# Altium PCB Smart Bottle.PcbDoc
Units mm, origin at the board's own origin, x right, y up, seen from the top; angles counter-clockwise.
Board outline 56.39 x 47.12 mm, 2 copper layers (Top Layer, Bottom Layer), stack 1 mm thick; 12 components, 14 nets, 71 pads, 1 vias.
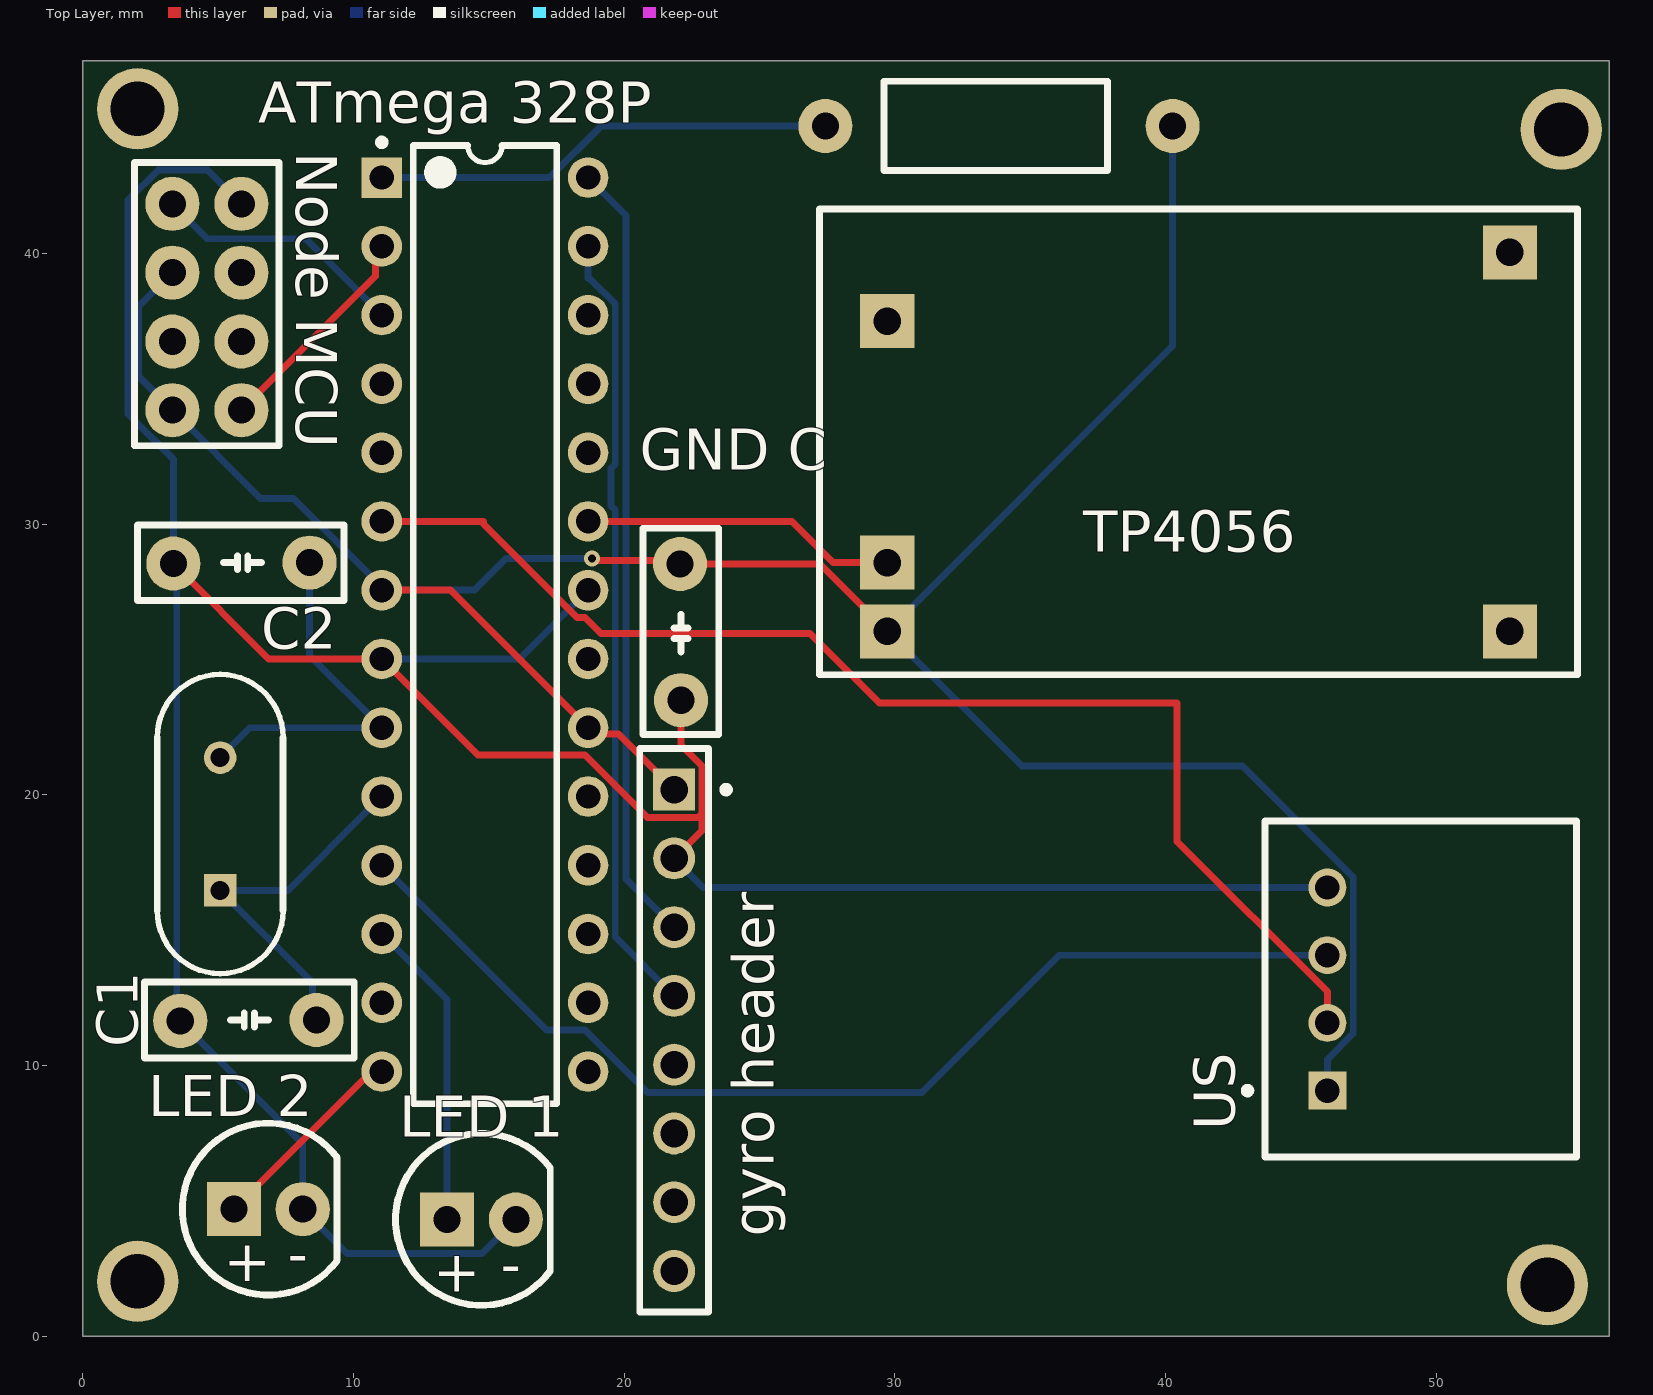
[diagram p0: Top Layer view]
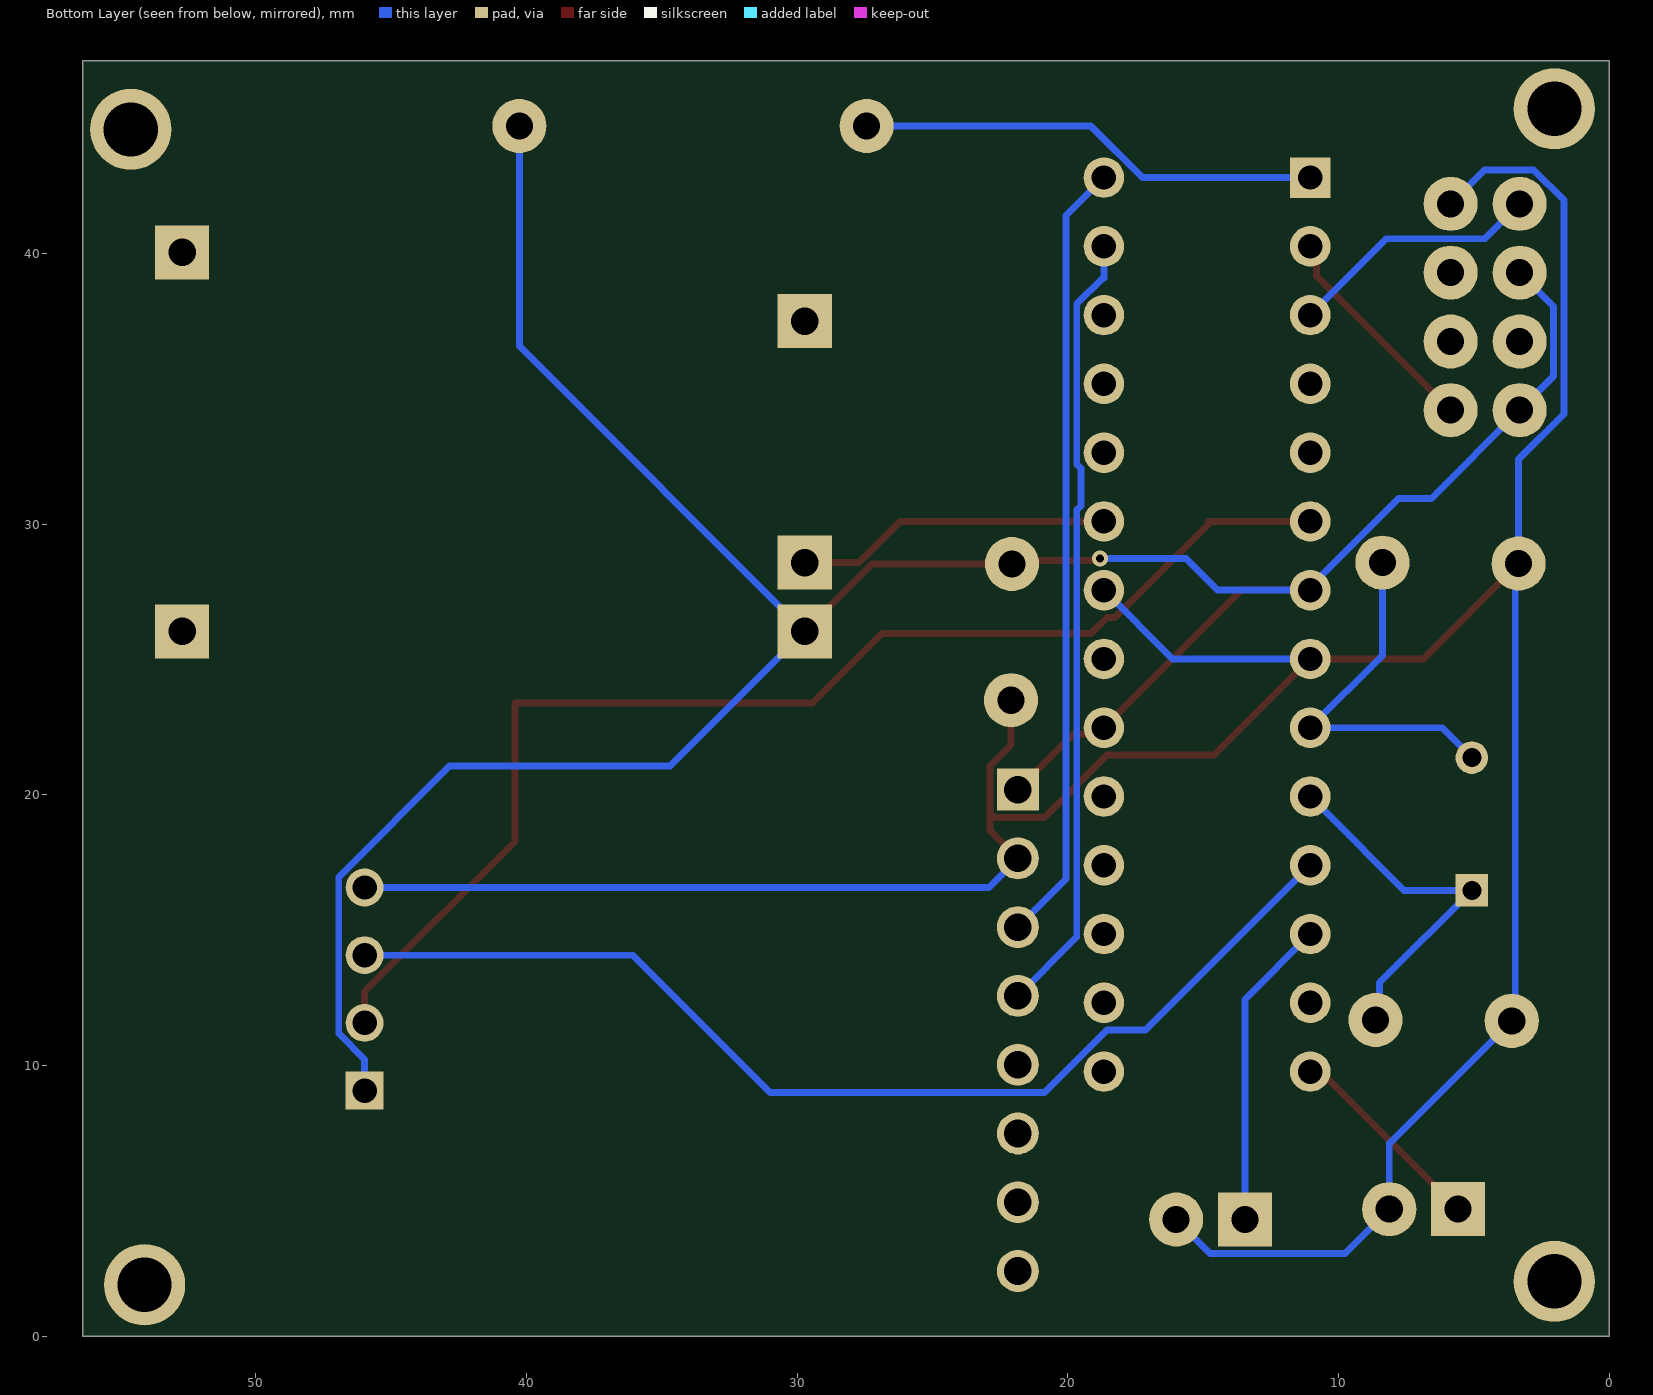
[diagram p1: Bottom Layer view, seen from below]
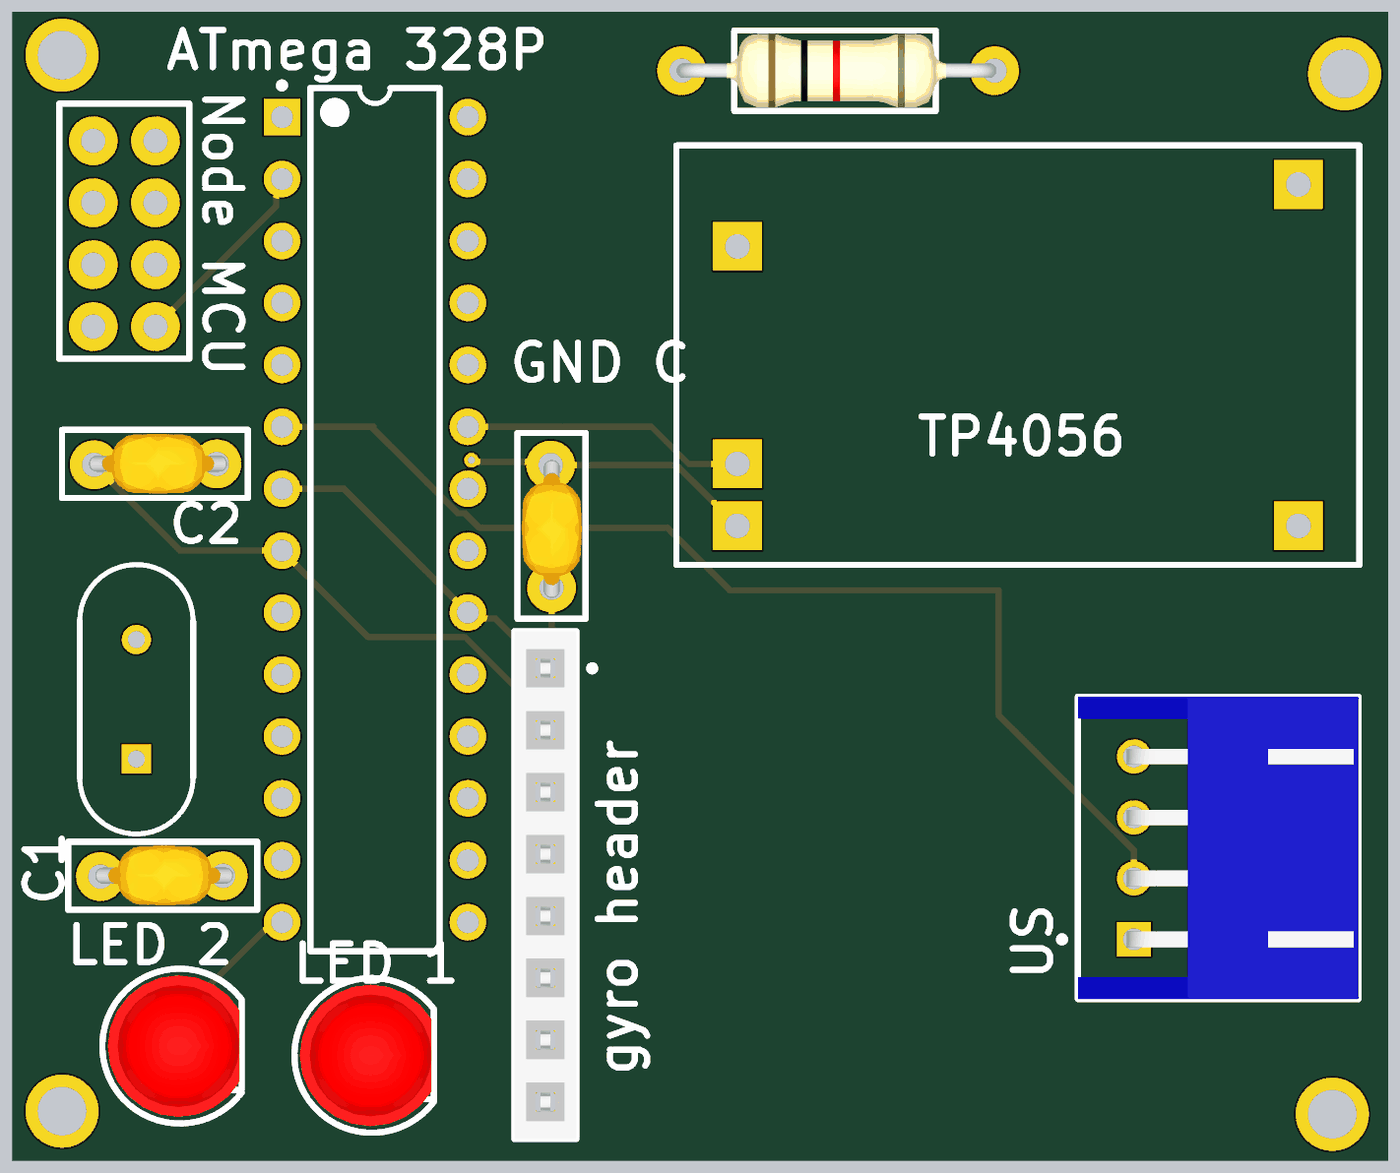
[diagram p2: 3D render of the assembled board from above, using the file's embedded part models]

## Layer stack, top to bottom
Top Solder: solder mask 0.05, SM-001, Dk 4
Top Layer: signal copper 0.1
Dielectric 1: dielectric 0.8, FR-4, Dk 4.8
Bottom Layer: signal copper 0.1
Bottom Solder: solder mask 0.05, SM-001, Dk 4

## Board outline
0,47.117 56.388,47.117 56.388,0 0,0

## Design rules (kind name [scope] priority, off if disabled: settings)
BoardOutlineClearance [All] p1: gap=0.2 ignorepadtopadclearanceinfootprint=FALSE
Clearance [All] p1: gap=0.127 ignorepadtopadclearanceinfootprint=FALSE except(0.25: Arc-Hole Track-Hole SMDPad-Hole THPad-Hole Via-Hole Fill-Hole Poly-Hole Region-Hole Text-Hole)
ComponentClearance [All] p1: gap=0.127 collisioncheckmode=3 verticalgap=0.127 showdistances=TRUE
DiffPairsRouting [All] p1: maxlimit=0.254 minlimit=0.127 mostfreqgap=0.127 toplayer_minwidth=0.127 toplayer_maxwidth=25.4 toplayer_prefwidth=0.127 bottomlayer_minwidth=0.127 bottomlayer_maxwidth=25.4 bottomlayer_prefwidth=0.127 maxuncoupledlength=12.7
Height [All] p1: minheight=0 maxheight=1816.048 prefheight=12.7
HoleSize [All] p1: absolutevalues=TRUE maxlimit=6.3 minlimit=0.3 maxpercent=80.000 minpercent=20.000
HoleToHoleClearance [All] p1: gap=0.25 allowstackedmicrovias=FALSE
MinimumAnnularRing [All] p1: minimumring=0.076
MinimumSolderMaskSliver [IsText vs OnLayer('Top Layer')] p1: minsoldermaskwidth=0
PlaneClearance [All] p1: clearance=0.127
PlaneConnect PlaneConnectPowerPads [InPadClass('PowerPads')] p1: planeconnectstyle=Direct reliefexpansion=0.508 reliefentries=4 reliefconductorwidth=0.254 reliefairgap=0.254
PlaneConnect [All] p2: pad.planeconnectstyle=Relief pad.reliefexpansion=0.3 pad.reliefentries=4 pad.reliefconductorwidth=0.127 pad.reliefairgap=0.127 via.planeconnectstyle=Direct via.reliefexpansion=0.3 via.reliefentries=4 via.reliefconductorwidth=0.127 via.reliefairgap=0.127
PolygonConnect PolygonConnectPowerPads [All vs (InPadClass('PowerPads'))] p1: connectstyle=Direct reliefconductorwidth=0.254 reliefentries=4 polygonreliefangle="90 Angle" airgapwidth=0.254
PolygonConnect [All] p2: thpad.connectstyle=Relief thpad.reliefconductorwidth=0.127 thpad.reliefentries=4 thpad.polygonreliefangle="90 Angle" thpad.airgapwidth=0.127 smdpad.connectstyle=Relief smdpad.reliefconductorwidth=0.127 smdpad.reliefentries=4 smdpad.polygonreliefangle="90 Angle" smdpad.airgapwidth=0.127 via.connectstyle=Direct via.reliefconductorwidth=0.127 via.reliefentries=4 via.polygonreliefangle="90 Angle" via.airgapwidth=0.127
RoutingVias [All] p1: holewidth=0.3 width=0.6 viastyle="Through Hole" minholewidth=0.3 minwidth=0.6 maxholewidth=0.6 maxwidth=6.6
SilkToSilkClearance [All] p1: silktosilkclearance=0
SilkToSolderMaskClearance [IsPad] p1: minsilkscreentomaskgap=0.127 clearancetoexposedcopper=TRUE
SolderMaskExpansion [All] p1: expansion=0.075 istentingtop=FALSE
Width Width_2 [All] p1: maxlimit=0.254 minlimit=0.254 preferedwidth=0.254
Width Width_1 [Not All] p2: maxlimit=0.254 minlimit=0.254 preferedwidth=0.254
Width [All] p3: maxlimit=25.4 minlimit=0.127 preferedwidth=0.127 minimp=50.000000 maximp=50.000000 favimp=50.000000
20 further rules are at their usual default settings.

## Components (designator, comment, footprint, x,y, rotation, side; value= is the part's Value field where it differs from the comment)
"ATmega 328P" "ATmega328P-PU" 28P3 14.859,26.289 r0 top (schematic designator "micro proccesor")
C1 "22pF" "CAPACITOR 103" 6.223,11.684 r90 top
C2 "22pF" "CAPACITOR 103" 5.969,28.575 r90 top
"GND C" "10uF" "CAPACITOR 103" 22.098,25.908 r0 top
"gyro header" "PPPC081LFBN-RC" SLIN-PPPC081LFBN-RC_V 21.844,11.303 r270 top
"LED 1" "LED1" LED_5mm_RED 14.683,4.338 r0 top
"LED 2" "LED2" LED_5mm_RED 6.809,4.719 r0 top
"Node MCU" "Female 4*2" FEMALE_4X2 4.572,37.973 r180 top (schematic designator "WiFi Module")
Resistor "Component_1" RESSITOR_PTH_12.5mm 33.655,44.704 r0 top
TP4056 "Component_1" TP4056Module 55.218,41.635 r180 top
US "S4B-XH-A(LF)(SN)" JST-S4B-XH-A(LF)(SN)_V 45.974,12.827 r90 top (schematic designator "ultra sonic header")
Y1 "HC-49US 16.000MHZ" JPY-HC-49US 5.08,18.923 r90 top

## Footprints (in the part's own frame and the unit in brackets; to place one, negate y for a bottom-side part, rotate by r counter-clockwise, add the part's x,y. Pads: shape width x height; smd on the part's side, far side on the other; paste and mask are expansions set on the pad)
28P3 [mm] "28-Pin Plastic Dual In-Line Package (PDIP)"
  rect 1.5x1.5 hole 0.9: 1(-3.81,16.51)
  round 1.5 hole 0.9: 2(-3.81,13.97) 3(-3.81,11.43) 4(-3.81,8.89) 5(-3.81,6.35) 6(-3.81,3.81) 7(-3.81,1.27) 8(-3.81,-1.27) 9(-3.81,-3.81) 10(-3.81,-6.35) 11(-3.81,-8.89) 12(-3.81,-11.43) 13(-3.81,-13.97) 14(-3.81,-16.51) 15(3.81,-16.51) 16(3.81,-13.97) 17(3.81,-11.43) 18(3.81,-8.89) 19(3.81,-6.35) 20(3.81,-3.81) 21(3.81,-1.27) 22(3.81,1.27) 23(3.81,3.81) 24(3.81,6.35) 25(3.81,8.89) 26(3.81,11.43) 27(3.81,13.97) 28(3.81,16.51)
  silkscreen extent -3.93,-17.7 2.65,17.93, body extent -3.6,-17.65 3.6,17.65, height 4.58
"CAPACITOR 103" [mm]
  round 2 hole 1: 1(0,-2.413) 2(-0.034,2.619)
  silkscreen extent -1.4,-3.81 1.4,3.94, body extent -1.22,-2.82 1.24,2.82, height 5.3
FEMALE_4X2 [mm]
  round 2 hole 1: 1(-1.29,3.766) 2(-1.29,1.226) 3(-1.29,-1.314) 4(-1.29,-3.854) 5(1.26,-3.854) 6(1.26,-1.314) 7(1.26,1.226) 8(1.26,3.766)
  silkscreen extent -2.68,-5.38 2.66,5.08, body extent -2.29,-4.81 2.25,4.81, height 8.6
JPY-HC-49US [mm] "THD, 2-Leads, Body 11.05x4.65mm, Pitch 4.9mm"
  rect 1.2x1.2 hole 0.7: 1(-2.45,0)
  round 1.2 hole 0.7: 2(2.45,0)
  silkscreen extent -5.53,-2.32 5.53,2.32, body extent -5.53,-2.33 5.52,2.32, height 3.5
JST-S4B-XH-A(LF)(SN)_V [mm] "Header, 4-Leads, Body 12.4x11.5mm, Pitch 2.5mm"
  rect 1.4x1.4 hole 0.9: 1(-3.75,0)
  round 1.4 hole 0.9: 2(-1.25,0) 3(1.25,0) 4(3.75,0)
  silkscreen extent -6.2,-9.2 6.2,3.07, body extent -6.2,-9.2 6.2,2.3, height 6.15
LED_5mm_RED [mm]
  rect 2x2 hole 1: 1(-1.221,-0.02)
  round 2 hole 1: 2(1.319,-0.02)
  silkscreen extent -3.12,-3.19 2.59,3.15, body extent -2.89,-2.92 2.5,2.88, height 8.72
RESSITOR_PTH_12.5mm [mm]
  round 2 hole 1: 1(-6.223,0) 2(6.604,0)
  silkscreen extent -4.06,-1.65 4.19,1.65, body extent -6.42,-1.51 6.68,1.5, height 3.2
SLIN-PPPC081LFBN-RC_V [mm] "THD, 8-Leads, Body 20.82x2.54mm, Pitch 2.54mm"
  rect 1.55x1.55 hole 1.02: 1(-8.89,0)
  round 1.55 hole 1.02: 2(-6.35,0) 3(-3.81,0) 4(-1.27,0) 5(1.27,0) 6(3.81,0) 7(6.35,0) 8(8.89,0)
  silkscreen extent -10.41,-1.27 10.41,2.05, body extent -10.41,-1.27 10.41,1.27, height 8.5
TP4056Module [mm]
  rect 2x2 hole 1.016: 1(2.5,15.6) 2(2.5,1.6) 3(25.5,15.6) 4(25.5,13.06) 5(25.5,4.14)
  silkscreen extent 0,0 28,17.2

## Part data
"ATmega 328P": library part CMP-0095-00013-2, "8-bit AVR Microcontroller, 32KB Flash, 1KB EEPROM, 2KB SRAM, 28-pin PDIP, Industrial Grade (-40°C to 85°C)", ComponentLink1Description="Manufacturer URL", ComponentLink1URL=http://www.atmel.com/, ComponentLink2Description="ATmega48A/48PA/88A/88PA/168A/168PA/328/328P Datasheet", ComponentLink2URL=http://www.atmel.com/dyn/resources/prod_documents/8271.pdf, ComponentLink3Description="ATmega48A/48PA/88A/88PA/168A/168PA/328/328P Summary", ComponentLink3URL=http://www.atmel.com/dyn/resources/prod_documents/8271S.pdf, DatasheetVersion="revD, May-2011", PackageDescription="28-lead (0.300\"/7.62mm Wide) Plastic Dual Inline Package (PDIP)", PackageReference=28P3, PackageVersion="revB, Sep-2001", RevisionNote="DatasheetVersion updated. URLs added."
C1 C2 "GND C" "LED 1" "LED 2" "Node MCU": library part Component_1
"gyro header": library part CMP-002-00028-2, "Female Header, Pitch 2.54 mm, 1 x 8 Position, Height 8.5 mm, Tail Length 3.2 mm, -40 to 105 degC, RoHS, Bulk", Manufacturer=Sullins, Max Operating Temperature=105°C, Min Operating Temperature=-40°C, Package Description="Female Header, Pitch 2.54 mm, 1 x 8 Position, Height 8.5 mm, Tail Length 3.2 mm", Case/Package=PPPC081LFBN-RC, Connector Type=Header, Datasheet URL=http://sullinscorp.com/catalogs/101_PAGE114-115_.100_FEMALE_HDR.pdf, Datasheet Version=Jan-15, Gender=Female, Mounting Technology=TH, Package Reference=PPPC081LFBN-RC, RoHS Compliant=Unknown
US: library part CMP-002-00034-2, "Male Header, Pitch 2.5 mm, 1 x 4 Position, Height 6.1 mm, Tail Length 3.4 mm, -25 to 85 degC, RoHS, Bulk", Manufacturer=JST, Max Operating Temperature=85°C, Min Operating Temperature=-25°C, Package Description="XH Series Disconnectable Crimp Style Connector, Pitch 2.5 mm, 1 x 4 Position, Height 6.1 mm, Tail Length 3.4 mm", Case/Package=S4B-XH-A(LF)(SN), Connector Type=Header, Datasheet URL=http://www.jst-mfg.com/product/pdf/eng/eXH.pdf, Datasheet Version=May-16, Gender=Male, Manufacturer URL=http://www.jst.com/home2.html, Mounting Technology=TH, Package Reference=S4B-XH-A(LF)(SN), RoHS Compliant=Unknown
Y1: library part CMP-003-00005-2, "Crystal, 16 MHz, +/- 30 ppm, 18 pF, -20 to 70 degC, 2-Pin THD", Case/Package=HC-49US, Frequency=16MHz, Manufacturer="Jing peng yuan", Package Description="2-Pin Throug Hole Device, Body 11.05 x 4.65 mm, Pitch 4.9 mm", Datasheet URL=https://statics3.seeedstudio.com/images/opl/datasheet/306010014.pdf, Datasheet Version=May-15, Mounting Technology=TH, Package Reference=HC-49US, RoHS Compliant=Unknown

## Free pads (board coordinates)
  round 3 hole 2 unplated: 2(2.032,2.032) 2(2.032,45.339) 2(54.102,1.905) 2(54.61,44.577)

## Via types
v1: diameter 0.6, hole 0.3, Top Layer to Bottom Layer, 1 vias

## Nets (pads, with @x,y where several pads share a name; then routed paths per layer and width w, separated by ;. In a path a pad name is that pad's centre, name@x,y a point inside that pad or via, vN(x,y) a via of type N, cw(c..) or ccw(c..) an arc to the next point about the centre after c; other vN are vias at no path point)
NetC1_1: "ATmega 328P.10" C1.1 Y1.1 | length 13.6
  Bottom Layer w0.254: C1.1 8.488,11.832 8.488,13.065 Y1.1 7.583,16.473 10.541,19.431 10.541,20.066
NetC1_2: "ATmega 328P.8" "ATmega 328P.22" "GND C.1" "gyro header.2" "LED 1.2" "LED 2.2" "Node MCU.4" C1.2 C2.2 US.4 | length 117.5
  Top Layer w0.254: C2.2 6.872,25.019 11.049,25.019 14.593,21.475 18.553,21.475 20.864,19.164 22.724,19.164 22.873,19.313 ; 21.844,17.653 22.873,18.682 22.873,19.313 ; 22.098,23.495 22.098,21.848 22.873,21.073 22.873,19.313
  Bottom Layer w0.254: 5.862,41.827 4.608,43.081 2.793,43.081 1.677,41.965 1.677,34.068 3.35,32.395 C2.2 3.477,28.414 3.477,11.777 C1.2 8.128,7.126 8.128,4.699 9.763,3.064 14.748,3.064 16.002,4.318 ; 11.049,25.019 16.129,25.019 18.669,27.559 ; 21.844,17.653 22.92,16.577 US.4
NetC2_1: "ATmega 328P.9" C2.1 Y1.2 | length 13.6
  Bottom Layer w0.254: Y1.2 6.186,22.479 11.049,22.479 8.382,25.146 C2.1
"NetGND C_2": "ATmega 328P.7" "ATmega 328P.20" "GND C.2" "gyro header.1" "Node MCU.6" "Node MCU.8" Resistor.2 TP4056.3 US.1 | length 103.1
  Top Layer w0.254: 11.049,27.559 13.589,27.559 18.669,22.479 18.907,22.241 19.796,22.241 21.844,20.193 ; v1(18.815,28.727) 18.881,28.661 21.93,28.661 22.064,28.527 27.226,28.527 TP4056.3
  Bottom Layer w0.254: 3.312,39.287 2.058,38.032 2.058,35.461 3.312,34.207 6.569,30.95 7.781,30.95 11.049,27.681 11.049,27.559 14.47,27.559 15.638,28.727 v1(18.815,28.727) ; Resistor.2 40.259,36.576 TP4056.3 34.686,21.067 42.833,21.067 46.928,16.972 46.928,11.182 45.974,10.228 US.1
"Netgyro header_3": "ATmega 328P.28" "gyro header.3" | length 29
  Bottom Layer w0.254: 18.669,42.799 20.066,41.402 20.066,16.891 21.844,15.113
"Netgyro header_4": "ATmega 328P.27" "gyro header.4" | length 29.2
  Bottom Layer w0.254: 18.669,40.259 18.669,39.079 18.729,39.079 19.673,38.135 19.673,32.223 19.512,32.062 19.512,30.676 19.673,30.515 19.673,14.744 21.844,12.573
"NetLED 1_1": "ATmega 328P.12" "LED 1.1" | length 11.6
  Bottom Layer w0.254: 10.983,14.793 11.049,14.859 13.462,12.446 13.462,4.318
"NetLED 2_1": "ATmega 328P.14" "LED 2.1" | length 7.7
  Top Layer w0.254: 5.588,4.699 10.405,9.516 10.786,9.516 11.049,9.779 10.941,9.779
"Netmicro proccesor_1": "ATmega 328P.1" Resistor.1 | length 17.2
  Bottom Layer w0.254: 11.049,42.799 17.249,42.799 19.154,44.704 Resistor.1
"Netmicro proccesor_2": "ATmega 328P.2" "Node MCU.1" | length 8.4
  Top Layer w0.254: 5.862,34.207 10.811,39.155 10.811,40.021 11.049,40.259 11.049,40.08
"Netmicro proccesor_3": "ATmega 328P.3" "Node MCU.5" | length 9.6
  Top Layer w0.254: 10.998,37.668 11.049,37.719 11.049,37.655
  Bottom Layer w0.254: 3.312,41.827 4.598,40.541 8.227,40.541 11.049,37.719
"Netmicro proccesor_6": "ATmega 328P.6" US.2 | length 46.3
  Top Layer w0.254: 11.049,30.099 14.799,30.099 14.799,30.009 18.253,26.555 18.553,26.555 19.148,25.96 26.859,25.96 29.428,23.391 40.419,23.391 40.419,18.283 45.974,12.728 US.2
"Netmicro proccesor_11": "ATmega 328P.11" US.3 | length 40.5
  Bottom Layer w0.254: 11.049,17.399 17.133,11.315 18.553,11.315 20.864,9.004 31.004,9.004 36.077,14.077 US.3
"Netmicro proccesor_23": "ATmega 328P.23" TP4056.4 | length 11.7
  Top Layer w0.254: 18.669,30.099 26.193,30.099 27.717,28.575 TP4056.4
pads on no net: "ATmega 328P.4" "ATmega 328P.5" "ATmega 328P.13" "ATmega 328P.15" "ATmega 328P.16" "ATmega 328P.17" "ATmega 328P.18" "ATmega 328P.19" "ATmega 328P.21" "ATmega 328P.24" "ATmega 328P.25" "ATmega 328P.26" "gyro header.5" "gyro header.6" "gyro header.7" "gyro header.8" "Node MCU.2" "Node MCU.3" "Node MCU.7" TP4056.1 TP4056.2 TP4056.5

## Text inside footprints (layer, text, board x,y; h text height)
"LED 1": Top Overlay "+" at 12.954,1.651 h1.52; Top Overlay "-" at 15.445,1.925 h1.52
"LED 2": Top Overlay "+" at 5.207,2.032 h1.52; Top Overlay "-" at 7.571,2.306 h1.52